# Altium PCB PMM_MSPC_22A.PcbDoc (part 5 of 5)
Units mm, origin at the board's own origin, x right, y up, seen from the top; angles counter-clockwise.
Board outline 86.91 x 61.9 mm, 4 copper layers (Top Layer, GroundPlane, MidLayer1, Bottom Layer); 159 components, 129 nets, 534 pads, 221 vias.
Unrouted connection lines stored in the file: 36.
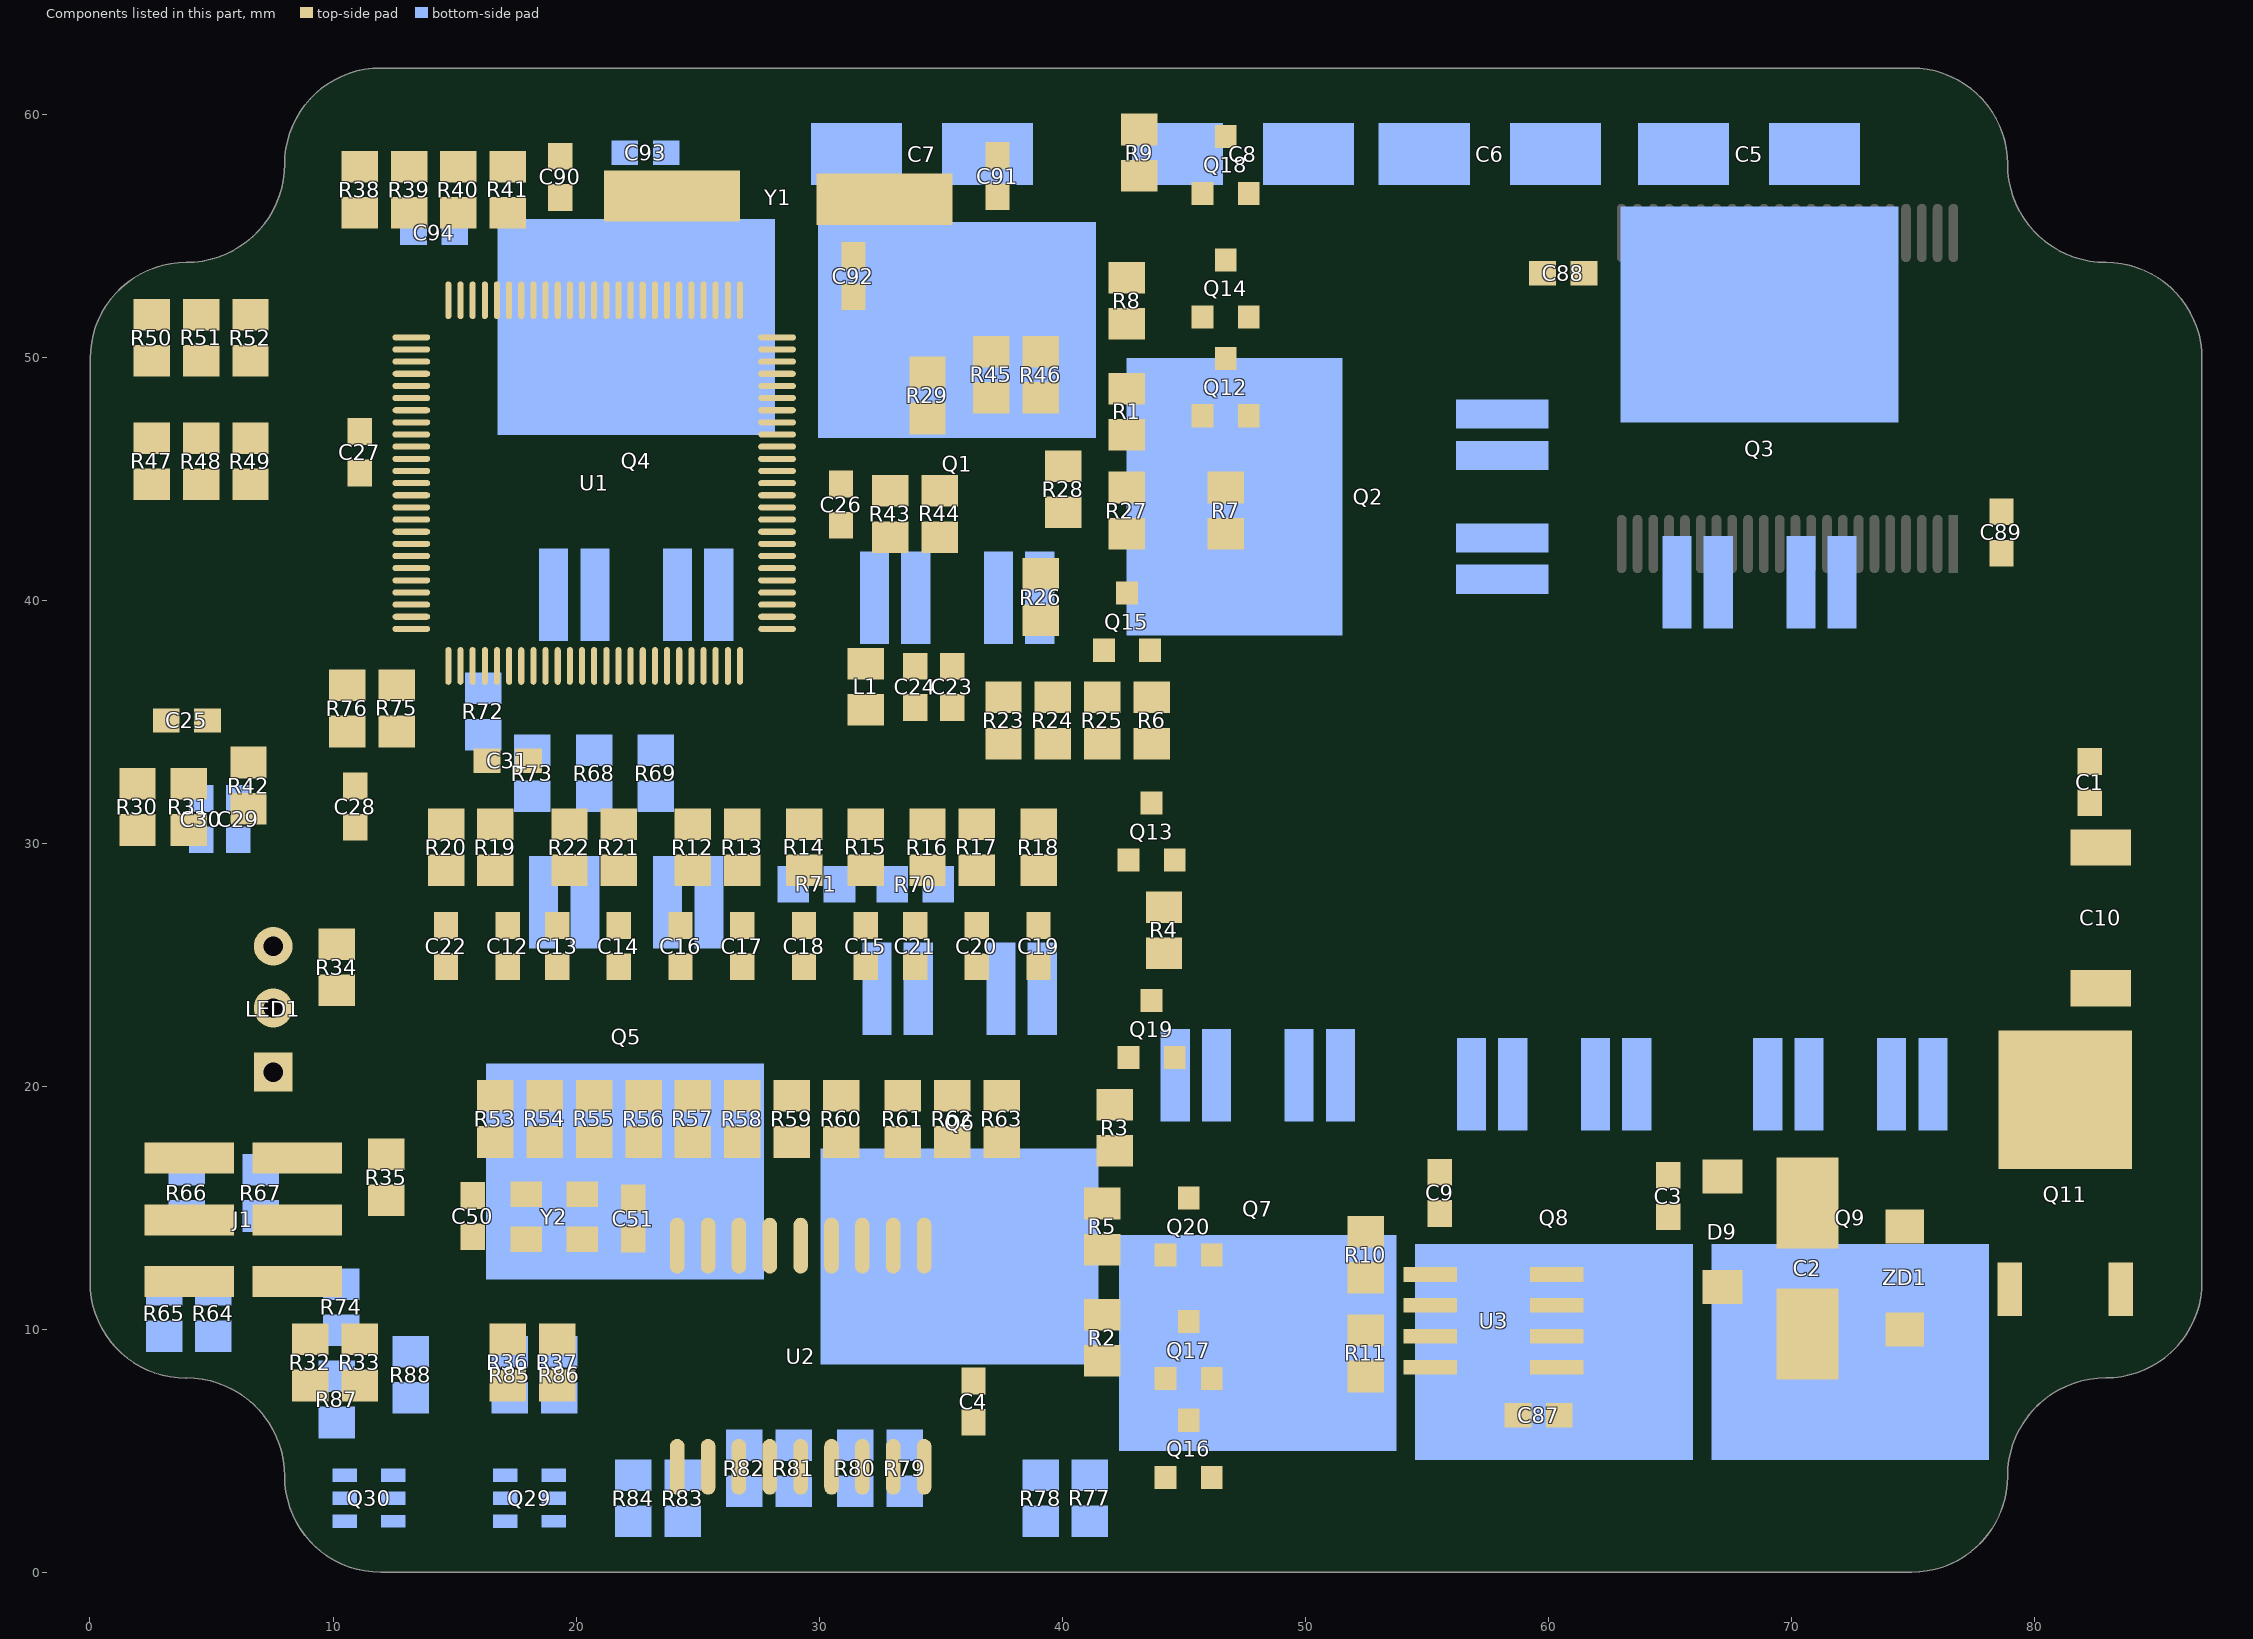
[diagram p7: the components of this part, seen from the top]

## Silkscreen, mask and mechanical layers (free items; w line width, h text height) (continued)
Bottom Solder:
  region: 63.851,34.151 74.051,34.151 77.516,37.616 77.516,45.284 74.044,48.756 54.148,48.756 52.243,46.851 51.07,46.851 49.951,56.3 77.4,56.3 85.57,48.13 85.57,12.77 77.995,5.195 43.099,5.195 40.559,7.735 25.446,7.735 20.874,12.307 14.905,12.307 9.698,17.514 9.698,46.591 19.243,56.249 49.957,56.249 51.1,46.597 18.461,46.597 14.905,43.041 14.905,27.166 25.7,16.371 41.702,16.371 44.75,13.323 73.823,13.323 77,16.5 77,23.1 72.299,27.801 63.699,27.801 63.2,28.3 63.2,33.5
  lines w2: 19.858,40.628 19.858,40.374 19.858,38.882 21.064,37.675 21.541,37.199 23.101,37.199 24.752,35.548 33.352,35.548 35.765,33.135 ; 24.557,26.658 24.557,29.706 25.7,30.849 33.098,30.849 37.13,30.849 37.892,30.087 52.404,30.087 cw(c52.404,26.034) 55.27,28.9 ; 33.193,41.009 33.193,39.231 36.876,35.548 52.788,35.548 ; 35.815,33.085 55.27,33.085 ; 37.6,24.6 51.901,24.6 ; 50.1,20.9 52.9,20.9 56.77,24.77 ; 51.463,35.548 ccw(c51.463,38.747) 53.725,36.485 ; 51.713,35.548 ccw(c51.713,38.457) 53.77,36.4 ; 51.901,24.626 ccw(c51.901,27.269) 53.77,25.4 ; 56.77,36.4 56.77,40.27 58.525,42.025 ; 59.77,36.4 59.77,37.844 61.919,39.993 66.594,39.993
  lines w2.4: 59.77,25.4 59.77,23.93 62.7,21 62.7,19.1 ; 71.77,25.43 75,22.2 75,19.3
Drill Guide:
  lines w4: 13.508,23.737 13.508,47.232
Mechanical 1:
  lines w0.127: 0.001,11.935 ccw(c3.951,11.935) 3.951,7.985 ; 0.01,49.95 cw(c3.96,49.95) 3.96,53.9 ccw(c3.96,57.95) 8.01,57.95 cw(c11.96,57.95) 11.96,61.901 ; 3.97,8 cw(c3.96,3.95) 8.01,3.95 ccw(c11.96,3.95) 11.96,0 ; 74.96,0 ccw(c74.96,3.95) 78.91,3.95 cw(c82.96,3.95) 82.96,8 ccw(c82.96,11.95) 86.91,11.95 ; 74.96,61.901 cw(c74.96,57.95) 78.91,57.95 ccw(c82.96,57.95) 82.96,53.9 cw(c82.96,49.95) 86.91,49.95
  lines w2.4: 0.01,11.95 0.01,49.95 ; 11.96,0 74.96,0 ; 11.96,61.901 74.96,61.901 ; 86.91,11.95 86.91,49.95
Mechanical 15:
  lines w0.254: 48.225,19.035 48.225,28.985 48.225,42.935 63.025,42.935 79.025,42.935 79.025,28.985 79.025,19.035 63.025,19.035 50.025,19.035